# Altium PCB EMG_v5_FAB_READY.PcbDoc
Units mm, origin at the board's own origin, x right, y up, seen from the top; angles counter-clockwise.
Board outline 90 x 70 mm, 2 copper layers (F.Cu, B.Cu), stack 1.6 mm thick; 138 components, 76 nets, 371 pads, 155 vias.
Unrouted connection lines stored in the file: 5.
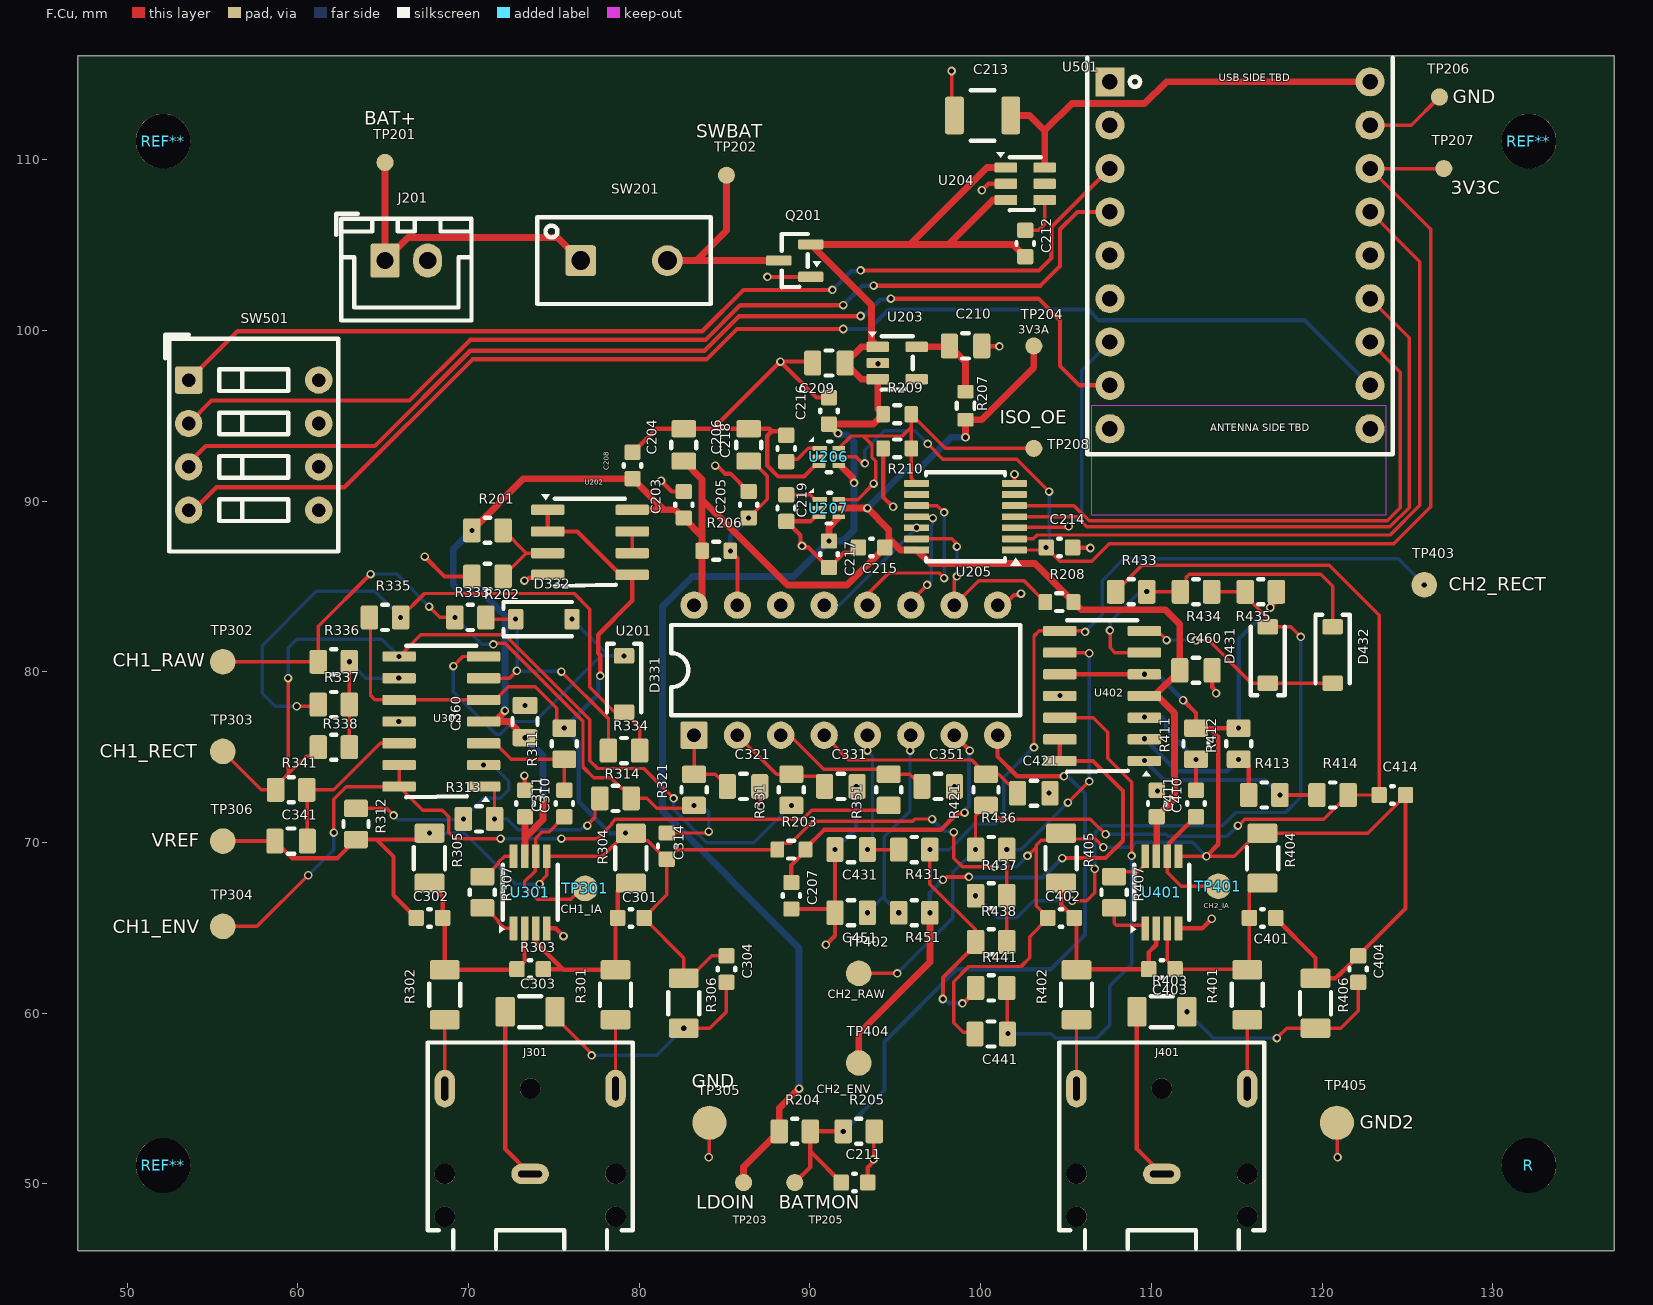
[diagram p0: F.Cu view]
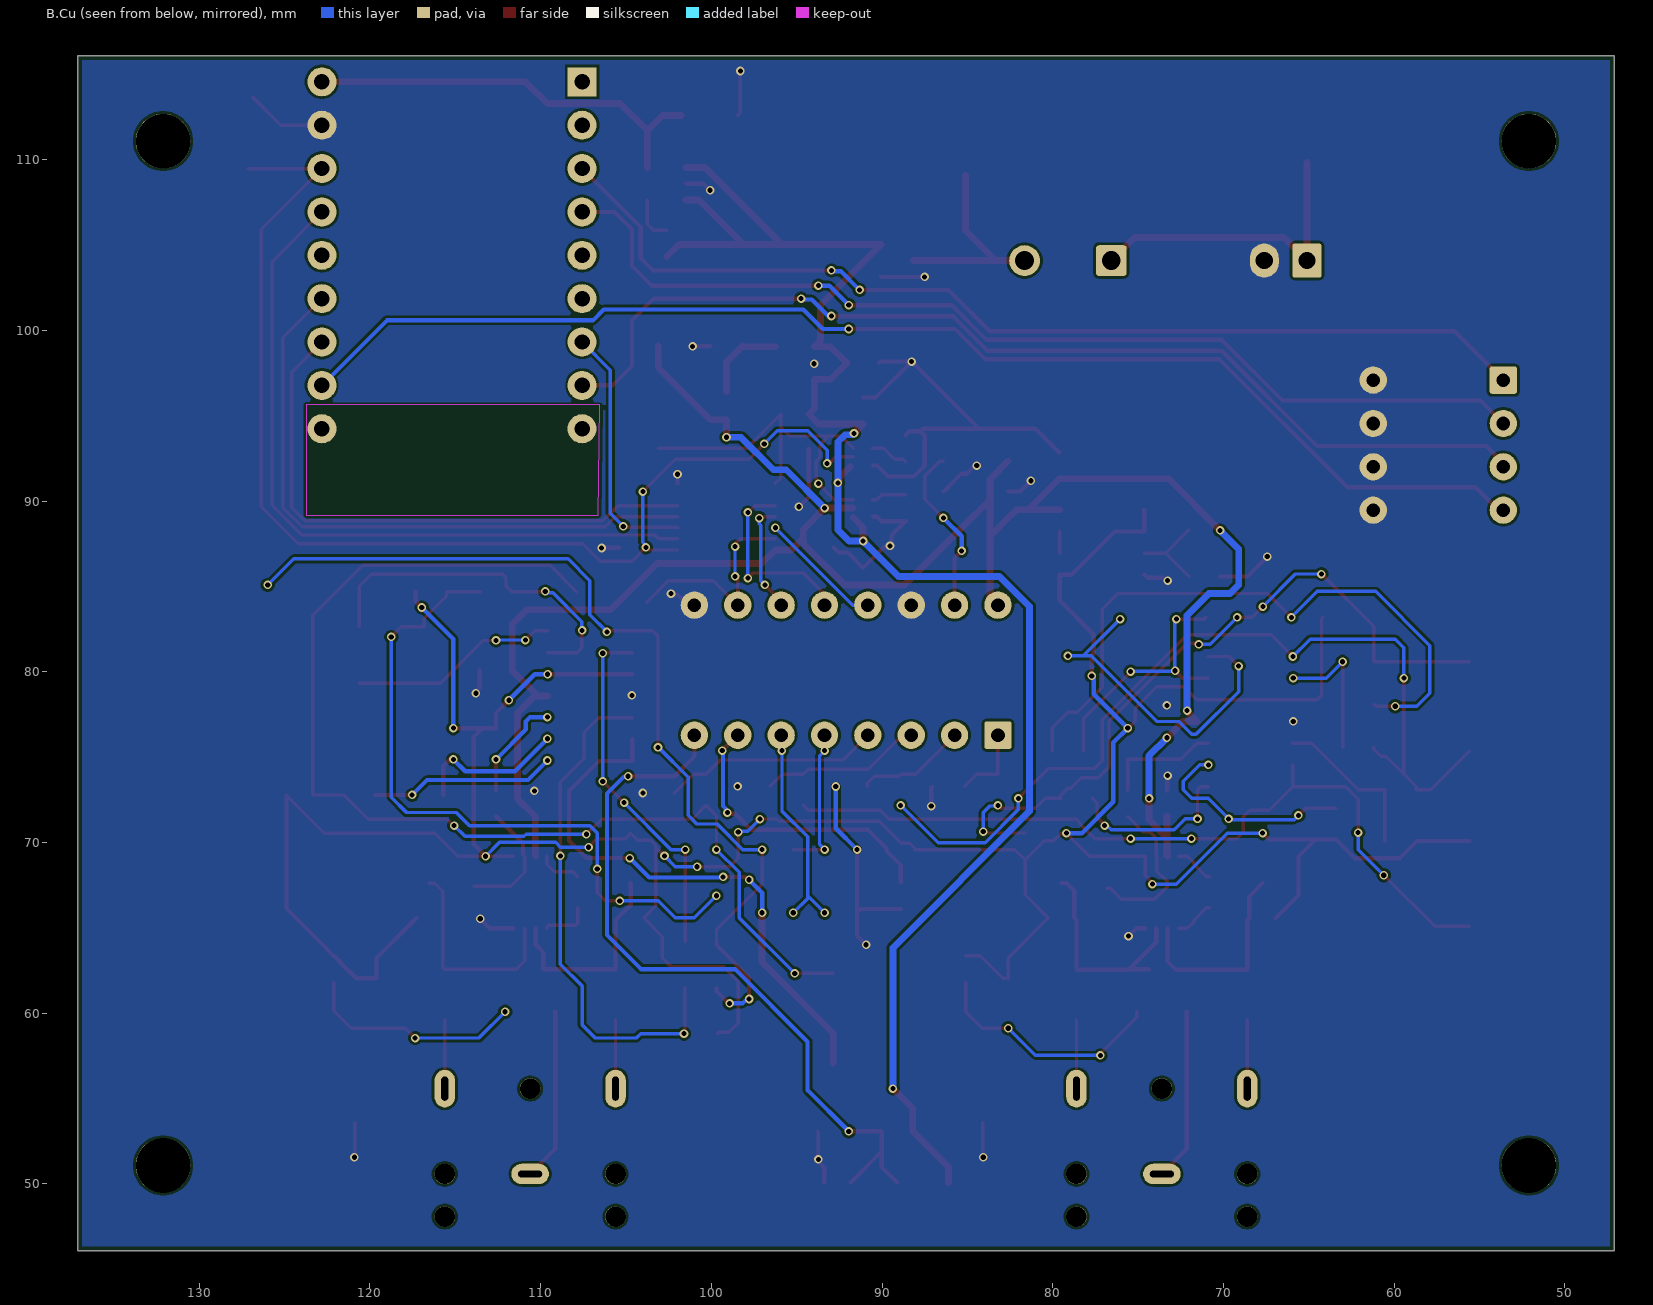
[diagram p1: B.Cu view, seen from below]

## Layer stack, top to bottom
F.Mask: solder mask 0.0102, Solder Resist, Dk 3.5
F.Cu: signal copper 0.0356
Dielectric 1: dielectric 1.5289, FR-4, Dk 4.8
B.Cu: signal copper 0.0356
B.Mask: solder mask 0.0102, Solder Resist, Dk 3.5

## Board outline
47.112,46.083 137.112,46.083 137.112,116.083 47.112,116.083

## Design rules (kind name [scope] priority, off if disabled: settings)
BoardOutlineClearance BoardOutlineClearanceBoard_Outline_Clearance_0p25 [IsPad Or IsVia Or OnLayer('F.Cu') Or OnLayer('B.Cu')] p1: gap=0.25 ignorepadtopadclearanceinfootprint=FALSE
Clearance "Clearence 0.25_NetClass" [InNetClass('ANALOG_SENSITIVE')] p1: gap=0.25 ignorepadtopadclearanceinfootprint=FALSE
Clearance "Clearence 0.15_NetClass" [InNetClass('Default') OR InNetClass('POWER')] p2: gap=0.15 ignorepadtopadclearanceinfootprint=FALSE
Clearance Clearance_General_0p15 [(IsPad Or IsVia Or OnLayer('F.Cu') Or OnLayer('B.Cu')) vs (IsPad Or IsVia Or OnLayer('F.Cu') Or OnLayer('B.Cu'))] p3: gap=0.15 ignorepadtopadclearanceinfootprint=FALSE
HoleSize Mounting_Holes_3p2mm [IsPad And (AsMM(HoleDiameter) >= 3.19) And (AsMM(HoleDiameter) <= 3.21)] p1: absolutevalues=TRUE maxlimit=3.4 minlimit=3 maxpercent=80.000 minpercent=20.000
HoleSize HoleSize_1 [All] p2: absolutevalues=TRUE maxlimit=2.54 minlimit=0.025 maxpercent=80.000 minpercent=20.000
MinimumAnnularRing MinimumAnnularRingMinimum_Annular_Ring_0p10 [IsVia Or (IsPad And PadIsPlated = 'True')] p1: minimumring=0.1
MinimumSolderMaskSliver [All] p1: minsoldermaskwidth=0
PolygonConnect [All] p1: connectstyle=Direct reliefconductorwidth=0.254 reliefentries=4 polygonreliefangle="90 Angle" airgapwidth=0.254
RoutingVias [All] p1: holewidth=0.711 width=0.5 viastyle="Through Hole" minholewidth=0.711 minwidth=0.5 maxholewidth=0.711 maxwidth=1
SilkToSilkClearance [All] p1: silktosilkclearance=0
SilkToSolderMaskClearance [IsPad] p1: minsilkscreentomaskgap=0.15 clearancetoexposedcopper=TRUE
SolderMaskExpansion [All] p1: expansion=0 istentingtop=FALSE
Width [All] p1: maxlimit=10 minlimit=0.2 preferedwidth=0.2 minimp=50.000000 maximp=50.000000 favimp=50.000000
26 further rules are at their usual default settings.

## Components (designator, comment, footprint, x,y, rotation, side; value= is the part's Value field where it differs from the comment)
C203 "Comment" C_0603_1608Metric 82.612,89.783 r90 top value=100nF
C204 "Comment" C_0805_2012Metric 82.612,93.283 r90 top value=1uF
C205 "Comment" C_0603_1608Metric 86.412,89.783 r90 top value=100nF
C206 "Comment" C_0805_2012Metric 86.412,93.283 r90 top value=1uF
C207 "Comment" C_0603_1608Metric 88.912,66.883 r270 top value=220pF
C208 "Comment" C_0603_1608Metric 79.612,92.083 r90 top value=100nF
C209 "Comment" C_0805_2012Metric 91.112,98.083 r180 top value=2.2uF
C210 "Comment" C_0805_2012Metric 99.112,99.083 r0 top value=2.2uF
C211 "Comment" C_0603_1608Metric 92.612,50.083 r0 top value=10nF
C212 "Comment" C_0603_1608Metric 102.612,105.083 r270 top value=2.2nF
C213 "Comment" C_1210_3225_Murata_GRM32_Reflow 100.112,112.583 r180 top value=47uF
C214 "Comment" C_0603_1608Metric 104.612,87.283 r0 top value=100nF
C215 "Comment" C_0603_1608Metric 93.612,87.283 r180 top value=100nF
C216 "Comment" C_0603_1608Metric 91.112,95.283 r90 top value=100nF
C217 "Comment" C_0603_1608Metric 91.112,86.883 r270 top value=100nF
C218 "Comment" C_0603_1608Metric 88.612,93.083 r90 top value=9.1nF
C219 "Comment" C_0603_1608Metric 88.612,89.583 r270 top value=9.1nF
C301 "Comment" C_0603_1608Metric 79.512,65.583 r180 top value=100pF
C302 "Comment" C_0603_1608Metric 67.712,65.583 r0 top value=100pF
C303 "Comment" C_0603_1608Metric 73.612,62.583 r180 top value=470pF
C304 "Comment" C_0603_1608Metric 85.112,62.583 r270 top value="100pF DNP"
C310 "Comment" C_0603_1608Metric 73.312,72.283 r270 top value=100nF
C311 "Comment" C_0603_1608Metric 75.612,72.283 r90 top value=100nF
C314 "Comment" C_0603_1608Metric 81.612,69.783 r270 top value=10nF
C321 "Comment" C_0805_2012Metric 86.112,73.283 r0 top value=1nF
C331 "Comment" C_0805_2012Metric 91.812,73.283 r0 top value=1nF
C341 "Comment" C_0805_2012Metric 59.612,70.083 r180 top value=1uF
C351 "Comment" C_0805_2012Metric 97.512,73.283 r0 top value=4.7nF
C360 "Comment" C_0805_2012Metric 73.312,77.083 r90 top value=100nF
C401 "Comment" C_0603_1608Metric 116.512,65.583 r180 top value=100pF
C402 "Comment" C_0603_1608Metric 104.712,65.583 r0 top value=100pF
C403 "Comment" C_0603_1608Metric 110.612,62.583 r180 top value=470pF
C404 "Comment" C_0603_1608Metric 122.112,62.583 r270 top value="100pF DNP"
C410 "Comment" C_0603_1608Metric 110.312,72.283 r270 top value=100nF
C411 "Comment" C_0603_1608Metric 112.612,72.283 r90 top value=100nF
C414 "Comment" C_0603_1608Metric 124.112,72.783 r0 top value=10nF
C421 "Comment" C_0805_2012Metric 103.112,72.883 r0 top value=1nF
C431 "Comment" C_0805_2012Metric 92.412,69.583 r180 top value=1nF
C441 "Comment" C_0805_2012Metric 100.612,58.783 r180 top value=1uF
C451 "Comment" C_0805_2012Metric 92.412,65.883 r180 top value=4.7nF
C460 "Comment" C_0805_2012Metric 112.612,80.083 r0 top value=100nF
D331 "Comment" D_SOD-123 79.112,79.283 r270 top value=BAS70ZFILM
D332 "Comment" D_SOD-123 74.412,83.083 r0 top value=BAS70ZFILM
D431 "Comment" D_SOD-123 116.812,80.983 r90 top value=BAS70ZFILM
D432 "Comment" D_SOD-123 120.612,80.983 r270 top value=BAS70ZFILM
J201 "Comment" JST_XH_B2B-XH-A_1x02_P2.50mm_Vertical 65.112,104.083 r0 top value=B2B-XH-A(LF)(SN)
J301 "Comment" Jack_3.5mm_CUI_SJ1-3523N_Horizontal 73.612,50.583 r0 top value=SJ1-3523N
J401 "Comment" Jack_3.5mm_CUI_SJ1-3523N_Horizontal 110.612,50.583 r0 top value=SJ1-3523N
Q201 "Comment" SOT-23 89.112,104.083 r180 top value=PMV48XP
R "Comment" MountingHole_3.2mm_M3 132.112,51.083 r0 top value=MountingHole_3.2mm_M3
R201 "Comment" R_0805_2012Metric 71.112,88.283 r0 top value=47k
R202 "Comment" R_0805_2012Metric 71.112,85.583 r180 top value=47k
R203 "Comment" R_0603_1608Metric 88.912,69.583 r0 top value=1k
R204 "Comment" R_0805_2012Metric 89.112,53.083 r0 top value=68k
R205 "Comment" R_0805_2012Metric 92.862,53.083 r0 top value=100k
R206 "Comment" R_0603_1608Metric 84.512,87.083 r0 top value=0R
R207 "Comment" R_0603_1608Metric 99.112,95.583 r270 top value=0R
R208 "Comment" R_0603_1608Metric 104.612,84.083 r0 top value=10k
R209 "Comment" R_0603_1608Metric 95.112,95.083 r0 top value="47k 1%"
R210 "Comment" R_0603_1608Metric 95.112,93.083 r180 top value="220k 1%"
R301 "Comment" R_1206_3216Metric 78.612,61.083 r90 top value=100k
R302 "Comment" R_1206_3216Metric 68.612,61.083 r90 top value=100k
R303 "Comment" R_1206_3216Metric 73.612,60.083 r0 top value=220k
R304 "Comment" R_1206_3216Metric 79.512,69.083 r270 top value=10M
R305 "Comment" R_1206_3216Metric 67.712,69.083 r270 top value=10M
R306 "Comment" R_1206_3216Metric 82.612,60.583 r270 top value=2.2M
R307 "Comment" R_0805_2012Metric 70.812,67.083 r270 top value="4.99k 0.1% RG"
R311 "Comment" R_0805_2012Metric 75.612,75.783 r90 top value=100k
R312 "Comment" R_0805_2012Metric 63.412,71.083 r270 top value=10k
R313 "Comment" R_0805_2012Metric 70.612,71.383 r0 top value=40.2k
R314 "Comment" R_0805_2012Metric 78.612,72.583 r0 top value=33k
R321 "Comment" R_0805_2012Metric 83.212,73.083 r90 top value=470R
R331 "Comment" R_0805_2012Metric 88.912,73.083 r90 top value=470R
R333 "Comment" R_0805_2012Metric 70.112,83.183 r0 top value=10k
R334 "Comment" R_0805_2012Metric 79.112,75.383 r180 top value=10k
R335 "Comment" R_0805_2012Metric 65.112,83.183 r0 top value=1M
R336 "Comment" R_0805_2012Metric 62.112,80.583 r0 top value=20k
R337 "Comment" R_0805_2012Metric 62.112,78.083 r0 top value=10k
R338 "Comment" R_0805_2012Metric 62.112,75.583 r0 top value=20k
R341 "Comment" R_0805_2012Metric 59.612,73.083 r0 top value=33k
R351 "Comment" R_0805_2012Metric 94.612,73.083 r90 top value=470R
R401 "Comment" R_1206_3216Metric 115.612,61.083 r90 top value=100k
R402 "Comment" R_1206_3216Metric 105.612,61.083 r90 top value=100k
R403 "Comment" R_1206_3216Metric 110.612,60.083 r0 top value=220k
R404 "Comment" R_1206_3216Metric 116.512,69.083 r270 top value=10M
R405 "Comment" R_1206_3216Metric 104.712,69.083 r270 top value=10M
R406 "Comment" R_1206_3216Metric 119.612,60.583 r270 top value=2.2M
R407 "Comment" R_0805_2012Metric 107.812,67.083 r270 top value="4.99k 0.1% RG"
R411 "Comment" R_0805_2012Metric 112.612,75.783 r90 top value=100k
R412 "Comment" R_0805_2012Metric 115.112,75.783 r90 top value=10k
R413 "Comment" R_0805_2012Metric 116.612,72.783 r0 top value=40.2k
R414 "Comment" R_0805_2012Metric 120.612,72.783 r0 top value=33k
R421 "Comment" R_0805_2012Metric 100.312,73.083 r90 top value=470R
R431 "Comment" R_0805_2012Metric 96.112,69.583 r180 top value=470R
R433 "Comment" R_0805_2012Metric 108.812,84.683 r0 top value=10k
R434 "Comment" R_0805_2012Metric 112.612,84.683 r180 top value=10k
R435 "Comment" R_0805_2012Metric 116.412,84.683 r180 top value=1M
R436 "Comment" R_0805_2012Metric 100.612,69.583 r0 top value=20k
R437 "Comment" R_0805_2012Metric 100.612,66.883 r0 top value=10k
R438 "Comment" R_0805_2012Metric 100.612,64.183 r0 top value=20k
R441 "Comment" R_0805_2012Metric 100.612,61.483 r0 top value=33k
R451 "Comment" R_0805_2012Metric 96.112,65.883 r180 top value=470R
REF** "Comment" MountingHole_3.2mm_M3 52.112,111.083 r0 top value=MountingHole_3.2mm_M3
REF** "Comment" MountingHole_3.2mm_M3 52.112,51.083 r0 top value=MountingHole_3.2mm_M3
REF** "Comment" MountingHole_3.2mm_M3 132.112,111.083 r0 top value=MountingHole_3.2mm_M3
SW201 "Comment" TS02CQE_SPST_THT 79.112,104.083 r0 top value=TS02CQE
SW501 "Comment" A6D-4100_THT_P2.54mm_W7.62mm 53.612,97.083 r0 top value=DEBUG_CFG
TP201 "Comment" TestPoint_Pad_D1.0mm 65.112,109.833 r0 top value=BAT_PACK+
TP202 "Comment" TestPoint_Pad_D1.0mm 85.112,109.083 r0 top value=SW_BAT+
TP203 "Comment" TestPoint_Pad_D1.0mm 86.112,50.083 r0 top value=LDO_IN
TP204 "Comment" TestPoint_Pad_D1.0mm 103.112,99.083 r0 top value=3V3_ADC
TP205 "Comment" TestPoint_Pad_D1.0mm 89.112,50.083 r0 top value=BAT_MON
TP206 "Comment" TestPoint_Pad_D1.0mm 126.873,113.665 r0 top value=GND
TP207 "Comment" TestPoint_Pad_D1.0mm 127.127,109.474 r0 top value=CARRIER_3V3
TP208 "Comment" TestPoint_Pad_D1.0mm 103.112,93.083 r0 top value=SPI_ISO_OE
TP301 "Comment" TestPoint_Pad_D1.5mm 76.835,67.31 r0 top value=EMG1_IA_OUT
TP302 "Comment" TestPoint_Pad_D1.5mm 55.612,80.583 r0 top value=EMG1_RAW_DRV
TP303 "Comment" TestPoint_Pad_D1.5mm 55.612,75.333 r0 top value=EMG1_RECT_DRV
TP304 "Comment" TestPoint_Pad_D1.5mm 55.612,65.083 r0 top value=EMG1_ENV_DRV
TP305 "Comment" TestPoint_Pad_D2.0mm 84.112,53.583 r0 top value=GND_CH1
TP306 "Comment" TestPoint_Pad_D1.5mm 55.612,70.083 r0 top value=ANALOG_VREF
TP401 "Comment" TestPoint_Pad_D1.5mm 113.919,67.437 r0 top value=EMG2_IA_OUT
TP402 "Comment" TestPoint_Pad_D1.5mm 92.862,62.333 r0 top value=EMG2_RAW_DRV
TP403 "Comment" TestPoint_Pad_D1.5mm 125.984,85.09 r0 top value=EMG2_RECT_DRV
TP404 "Comment" TestPoint_Pad_D1.5mm 92.862,57.083 r0 top value=EMG2_ENV_DRV
TP405 "Comment" TestPoint_Pad_D2.0mm 120.862,53.583 r0 top value=GND_CH2
U201 "Comment" DIP-16_W7.62mm 83.212,76.283 r90 top value=MCP3208-CI/P
U202 "Comment" SOIC-8_3.9x4.9mm_P1.27mm 77.112,87.583 r0 top value=MCP6002-I/SN
U203 "Comment" SOT-23-5 95.112,98.083 r0 top value=TPS7A2033PDBVR
U204 "Comment" SOT-23-6 102.612,108.583 r0 top value=TPS22917DBVR
U205 "Comment" TSSOP-14_4.4x5mm_P0.65mm 99.112,89.083 r180 top value=TXU0304PWR
U206 "Comment" WSON-6_1.5x1.5mm_P0.5mm 91.112,92.583 r0 top value=TPS3899DL30DSER
U207 "Comment" WSON-6_1.5x1.5mm_P0.5mm 91.112,89.583 r0 top value=TPS3899DL29DSER
U301 "Comment" INA333_DGK_VSSOP-8_TI 73.612,67.083 r90 top value=INA333AIDGKT
U302 "Comment" SOIC-14_3.9x8.7mm_P1.27mm 68.412,77.083 r180 top value=MCP6004-I/SL
U401 "Comment" INA333_DGK_VSSOP-8_TI 110.612,67.083 r90 top value=INA333AIDGKT
U402 "Comment" SOIC-14_3.9x8.7mm_P1.27mm 107.112,78.583 r180 top value=MCP6004-I/SL
U501 "Comment" DSTK22807_ESP32H2_SuperMini_Carrier_Measured_THT 115.189,104.394 r0 top value=DSTK22807_ESP32H2_SuperMini_Measured

## Footprints (in the part's own frame and the unit in brackets; to place one, negate y for a bottom-side part, rotate by r counter-clockwise, add the part's x,y. Pads: shape width x height; smd on the part's side, far side on the other; paste and mask are expansions set on the pad)
A6D-4100_THT_P2.54mm_W7.62mm [mm]
  rrect16% 1.6x1.6 hole 0.8 mask+0: 1(0,0)
  round 1.6 hole 0.8 mask+0: 2(0,-2.54) 3(0,-5.08) 4(0,-7.62) 5(7.62,-7.62) 6(7.62,-5.08) 7(7.62,-2.54) 8(7.62,0)
  silkscreen extent -1.38,-10.04 8.76,2.66
C_0603_1608Metric [mm]
  rrect25% 0.9x0.95 smd mask+0: 1(-0.775,0) 2(0.775,0)
  silkscreen extent -0.08,-0.51 0.08,0.51
C_0805_2012Metric [mm]
  rrect25% 1x1.45 smd mask+0: 1(-0.95,0) 2(0.95,0)
  silkscreen extent -0.2,-0.73 0.2,0.73
C_1210_3225_Murata_GRM32_Reflow [mm]
  rrect23% 1.1x2.2 smd mask+0.05: 1(-1.65,0) 2(1.65,0)
  silkscreen extent -0.7,-1.48 0.7,1.48
D_SOD-123 [mm]
  rrect25% 0.9x1.2 smd mask+0: 1(-1.65,0) 2(1.65,0)
  silkscreen extent -2.36,-1 1.65,1
DIP-16_W7.62mm [mm]
  rrect16% 1.6x1.6 hole 0.8 mask+0: 1(0,0)
  round 1.6 hole 0.8 mask+0: 2(0,-2.54) 3(0,-5.08) 4(0,-7.62) 5(0,-10.16) 6(0,-12.7) 7(0,-15.24) 8(0,-17.78) 9(7.62,-17.78) 10(7.62,-15.24) 11(7.62,-12.7) 12(7.62,-10.16) 13(7.62,-7.62) 14(7.62,-5.08) 15(7.62,-2.54) 16(7.62,0)
  silkscreen extent 1.16,-19.11 6.46,1.33
DSTK22807_ESP32H2_SuperMini_Carrier_Measured_THT [mm]
  rect 1.7x1.7 hole 0.9 mask+0: 1(-7.62,10.16)
  round 1.7 hole 0.9 mask+0: 2(-7.62,7.62) 3(-7.62,5.08) 4(-7.62,2.54) 5(-7.62,0) 6(-7.62,-2.54) 7(-7.62,-5.08) 8(-7.62,-7.62) 9(-7.62,-10.16) 10(7.62,10.16) 11(7.62,7.62) 12(7.62,5.08) 13(7.62,2.54) 14(7.62,0) 15(7.62,-2.54) 16(7.62,-5.08) 17(7.62,-7.62) 18(7.62,-10.16)
  silkscreen extent -8.95,-11.65 8.95,11.56
INA333_DGK_VSSOP-8_TI [mm]
  rrect11% 1.4x0.45 smd mask+0.05: 1(-2.113,0.975) 2(-2.113,0.325) 3(-2.113,-0.325) 4(-2.113,-0.975) 5(2.113,-0.975) 6(2.113,-0.325) 7(2.113,0.325) 8(2.113,0.975)
  silkscreen extent -2.4,-1.61 1.61,1.82
Jack_3.5mm_CUI_SJ1-3523N_Horizontal [mm]
  rrect100% 1.2x2.2 hole 1.4 slot 0.4 at 0 deg mask+0: R(-5,5) T(5,5)
  rrect100% 2.2x1.2 hole 0.4 slot 1.4 at 0 deg mask+0: S(0,0)
  round 1.2 hole 1.2 unplated mask+0: Un1(-5,0) Un2(-5,-2.5) Un3(0,5) Un4(5,0) Un5(5,-2.5)
  silkscreen extent -6,-4.37 6,7.7
JST_XH_B2B-XH-A_1x02_P2.50mm_Vertical [mm]
  rrect15% 1.7x2 hole 1 mask+0: 1(0,0)
  rrect100% 1.7x2 hole 1 mask+0: 2(2.5,0)
  silkscreen extent -2.85,-3.51 5.06,2.75
MountingHole_3.2mm_M3 [mm]
  round 3.2 hole 3.2 unplated mask+0: Un1(0,0)
R_0603_1608Metric [mm]
  rrect25% 0.8x0.95 smd mask+0: 1(-0.825,0) 2(0.825,0)
  silkscreen extent -0.18,-0.52 0.18,0.52
R_0805_2012Metric [mm]
  rrect24% 1.025x1.4 smd mask+0: 1(-0.913,0) 2(0.913,0)
  silkscreen extent -0.16,-0.73 0.16,0.73
R_1206_3216Metric [mm]
  rrect22% 1.125x1.75 smd mask+0: 1(-1.462,0) 2(1.462,0)
  silkscreen extent -0.66,-0.91 0.66,0.91
SOIC-8_3.9x4.9mm_P1.27mm [mm]
  rrect25% 1.95x0.6 smd mask+0: 1(-2.475,1.905) 2(-2.475,0.635) 3(-2.475,-0.635) 4(-2.475,-1.905) 5(2.475,-1.905) 6(2.475,-0.635) 7(2.475,0.635) 8(2.475,1.905)
  silkscreen extent -2.84,-2.56 2.06,2.8
SOIC-14_3.9x8.7mm_P1.27mm [mm]
  rrect25% 1.95x0.6 smd mask+0: 1(-2.475,3.81) 2(-2.475,2.54) 3(-2.475,1.27) 4(-2.475,0) 5(-2.475,-1.27) 6(-2.475,-2.54) 7(-2.475,-3.81) 8(2.475,-3.81) 9(2.475,-2.54) 10(2.475,-1.27) 11(2.475,0) 12(2.475,1.27) 13(2.475,2.54) 14(2.475,3.81)
  silkscreen extent -2.84,-4.44 2.06,4.7
SOT-23 [mm]
  rrect25% 1.475x0.6 smd mask+0: 1(-0.937,0.95) 2(-0.937,-0.95) 3(0.937,0)
  silkscreen extent -1.54,-1.56 0.76,1.56
SOT-23-5 [mm]
  rrect25% 1.325x0.6 smd mask+0: 1(-1.138,0.95) 2(-1.138,0) 3(-1.138,-0.95) 4(1.138,-0.95) 5(1.138,0.95)
  silkscreen extent -1.69,-1.56 0.91,1.84
SOT-23-6 [mm]
  rrect25% 1.325x0.6 smd mask+0: 1(-1.138,0.95) 2(-1.138,0) 3(-1.138,-0.95) 4(1.138,-0.95) 5(1.138,0) 6(1.138,0.95)
  silkscreen extent -1.69,-1.56 0.91,1.84
TestPoint_Pad_D1.0mm [mm]
  round 1 smd paste-1 mask+0: 1(0,0)
TestPoint_Pad_D1.5mm [mm]
  round 1.5 smd paste-1.5 mask+0: 1(0,0)
TestPoint_Pad_D2.0mm [mm]
  round 2 smd paste-2 mask+0: 1(0,0)
TS02CQE_SPST_THT [mm]
  rrect20% 1.8x1.8 hole 1.1 mask+0: 1(-2.54,0)
  round 1.8 hole 1.1 mask+0: 2(2.54,0)
  silkscreen extent -5.08,-2.54 5.08,2.54
TSSOP-14_4.4x5mm_P0.65mm [mm]
  rrect25% 1.475x0.4 smd mask+0: 1(-2.863,1.95) 2(-2.863,1.3) 3(-2.863,0.65) 4(-2.863,0) 5(-2.863,-0.65) 6(-2.863,-1.3) 7(-2.863,-1.95) 8(2.863,-1.95) 9(2.863,-1.3) 10(2.863,-0.65) 11(2.863,0) 12(2.863,0.65) 13(2.863,1.3) 14(2.863,1.95)
  silkscreen extent -3.29,-2.61 2.31,2.88
WSON-6_1.5x1.5mm_P0.5mm [mm]
  rrect25% 0.85x0.28 smd mask+0: 1(-0.525,0.5)
  rrect25% 0.75x0.28 smd mask+0: 2(-0.575,0) 3(-0.575,-0.5) 4(0.575,-0.5) 5(0.575,0) 6(0.575,0.5)
  silkscreen extent -1.18,-0.9 0.13,1.18

## Part data
C203 C204 C205 C206 C207 C208 C209 C210 C211 C212 C213 C214 C215 C216 C217 C218 C219 C301 C302 C303 C304 C310 C311 C314 C321 C331 C341 C351 C360 C401 C402 C403 C404 C410 C411 C414 C421 C431 C441 C451 C460: library part C, ki_fp_filters=C_*
  C203 C204 C205 C206 C207 C301 C302 C303 C304 C310 C311 C314 C321 C331 C341 C351 C360 C401 C402 C403 C404 C410 C411 C414 C421 C431 C441 C451 C460: KiLib_Generator=SMD_2terminal_chip_molded
  C208 C209 C210 C211 C214 C215 C216 C217 C218 C219: Datasheet=~, KiLib_Generator=SMD_2terminal_chip_molded
  C212: Datasheet=~, Description="TPS22917 CT timing capacitor; C0G/NP0, 10V minimum, +/-10% or better; exact MPN unresolved", KiLib_Generator=SMD_2terminal_chip_molded
  C213: Datasheet=~, Description="Carrier-side local bulk capacitor; X7R preferred, X5R acceptable, 10V minimum; exact MPN and effective capacitance unresolved"
D331 D332 D431 D432: library part D_Schottky, ki_fp_filters="TO-???* *_Diode_* *SingleDiode* D_*"
J201: library part EMG_Conn_01x02_Pin, Datasheet=~, KiLib_Generator=connector/JST
J301 J401: library part AudioJack3, ki_fp_filters=Jack*
Q201: library part PMV48XP, Datasheet=https://assets.nexperia.com/documents/data-sheet/PMV48XP.pdf, KiLib_Generator=package/gullwing
R REF** REF** REF**: library part MountingHole_3.2mm_M3, "Mounting Hole 3.2mm, M3, no annular, generated by kicad-footprint-generator mountinghole.py", KiLib_Generator=mounting_hardware/mounting_hole
R201 R202 R203 R204 R205 R206 R207 R208 R209 R210 R301 R302 R303 R304 R305 R306 R307 R311 R312 R313 R314 R321 R331 R333 R334 R335 R336 R337 R338 R341 R351 R401 R402 R403 R404 R405 R406 R407 R411 R412 R413 R414 R421 R431 R433 R434 R435 R436 R437 R438 R441 R451: library part R, KiLib_Generator=SMD_2terminal_chip_molded, ki_fp_filters=R_*
  R206 R207 R209 R210: Datasheet=~
  R208: Datasheet=~, Description="MCP3208 ADC-side CS/SHDN pull-up to 3V3_ADC"
SW201: library part EMG_SW_SPST, Datasheet=~
SW501: library part SW_DIP_x04, Description="4x DIP Switch, Single Pole Single Throw (SPST) switch, small symbol", KiLib_Generator=button_switch/DIP, ki_fp_filters=SW?DIP?x4*
TP201 TP207 TP208: library part EMG_TestPoint_1, Datasheet=~
TP202: library part EMG_TestPoint_2, Datasheet=~
TP203: library part EMG_TestPoint_3, Datasheet=~
TP204: library part EMG_TestPoint_4, Datasheet=~
TP205: library part EMG_TestPoint_5, Datasheet=~
TP206: library part EMG_TestPoint, Datasheet=~
TP301 TP302 TP303 TP304 TP305 TP306 TP401 TP402 TP403 TP404 TP405: library part TestPoint, Description="test point", ki_fp_filters="Pin* Test*"
U201: library part MCP3208, KiLib_Generator=package/DIP/legacy, ki_fp_filters="DIP*W7.62mm* SOIC*3.9x9.9mm*P1.27mm*"
U202: library part MCP6002-xP, KiLib_Generator=package/gullwing, ki_fp_filters="SOIC*3.9x4.9mm*P1.27mm* DIP*W7.62mm* TO*99* OnSemi*Micro8* TSSOP*3x3mm*P0.65mm* TSSOP*4.4x3mm*P0.65mm* MSOP*3x3mm*P0.65mm* SSOP*3.9x4.9mm*P0.635mm* LFCSP*2x2mm*P0.5mm* *SIP* SOIC*5.3x6.2mm*P1.27mm*"
U203: library part TPS7A2033PDBVR, Datasheet=https://www.ti.com/lit/ds/symlink/tps7a20.pdf, KiLib_Generator=package/gullwing
U204: library part TPS22917DBV, Datasheet=https://www.ti.com/lit/ds/symlink/tps22917.pdf, Description="1V to 5.5V, 2A load switch with full-time reverse-current blocking; exact MPN TPS22917DBVR", KiLib_Generator=package/gullwing, ki_fp_filters=SOT?23*
U205: library part TXU0304PWR_1, Datasheet=https://www.ti.com/lit/ds/symlink/txu0304.pdf, Description="TXU0304 fixed-direction four-bit dual-supply translator; PW 14-pin TSSOP pinout", KiLib_Generator=package/gullwing
U206 U207: library part TPS3899DL_DSE_1, Datasheet=https://www.ti.com/lit/ds/symlink/tps3899.pdf
  U206: Description="TPS3899DL active-low open-drain 3.0 V supervisor; DSE 6-pin WSON"
  U207: Description="TPS3899DL active-low open-drain 2.9 V supervisor; DSE 6-pin WSON"
U301 U401: library part INA333xxDGK, KiLib_Generator=package/gullwing, ki_fp_filters=VSSOP*3x3mm*P0.65mm*
U302 U402: library part MCP6004, KiLib_Generator=package/gullwing, ki_fp_filters="SOIC*3.9x8.7mm*P1.27mm* DIP*W7.62mm* TSSOP*4.4x5mm*P0.65mm* SSOP*5.3x6.2mm*P0.65mm* MSOP*3x3mm*P0.5mm*"
U501: library part DSTK22807_ESP32H2_SuperMini_Measured, Power_Assumption="GND is Power Input. 5V_VBUS and 3V3 are set as Power Input pins to avoid declaring the dev board as a rail source; USB-measured output behavior and external 3V3 powering are not approved by this symbol.", Description="DSTK22807 ESP32-H2 Super Mini dev board symbol matched to measured project-local carrier footprint. Pinout is based on project physical observation notes; right-row orientation and power-path behavior remain provisional."

## Via types
v1: diameter 0.5, hole 0.3, F.Cu to B.Cu, tented both sides, 155 vias

## Nets (pads, with @x,y where several pads share a name; then routed paths per layer and width w, separated by ;. In a path a pad name is that pad's centre, name@x,y a point inside that pad or via, vN(x,y) a via of type N, cw(c..) or ccw(c..) an arc to the next point about the centre after c; other vN are vias at no path point)
3V3_ADC: C203.1 C204.1 C208.1 C215.1 C310.2 C360.1 C410.2 C460.1 R201.1 R206.1 R207.2 R208.2 TP204.1 U201.16 U202.8 U205.14 U207.5 U301.7 U302.4 U401.7 U402.4 | length 121.2
  F.Cu w0.4: v1(70.199,88.283) 73.224,91.308 C208.1 81.362,89.558 81.362,89.488 ; v1(72.136,77.724) 72.136,77.67 71.975,77.509 71.975,77.496 71.562,77.083 71.549,77.083 72.362,77.083 v1(73.312,76.133) ; U301.7 73.312,69.22 73.312,70.333 ; C310.2@73.312,71.533 C310.2 73.312,70.333 ; v1(74.362,72.583) 74.362,71.333 73.362,70.333 73.312,70.333 ; U202.8 81.362,89.488 ; C204.1 83.687,91.258 83.687,90.333 ; U201.16 83.687,84.378 R206.1 83.687,87.933 ; U207.5 v1(93.362,89.583) 94.612,88.333 94.612,87.833 ; v1(99.112,93.733) R207.2 100.037,94.758 103.112,97.833 TP204.1 ; U401.7 110.312,69.22 C410.2 111.362,72.558 111.362,77.583 110.362,78.583 U402.4 110.162,78.583 C460.1 111.662,82.775 110.804,83.633 105.887,83.633 R208.2 103.187,86.333 97.05,86.333 U205.14 95.312,87.133 94.612,87.833 ; 81.362,89.488 82.132,89.488 C203.1 83.687,87.933 ; 83.687,87.933 83.687,90.333 ; 83.687,90.333 83.687,90.075 85.396,88.367 88.686,85.076 92.18,85.076 C215.1 94.612,87.508 94.612,87.833
  B.Cu w0.4: v1(70.199,88.283) 69.112,87.195 69.112,85.083 69.612,84.583 70.862,84.583 72.136,83.309 v1(72.136,77.724) ; v1(73.312,76.133) 74.362,75.083 v1(74.362,72.583) ; v1(93.362,89.583) 95.612,91.833 96.362,91.833 98.262,93.733 v1(99.112,93.733)
ADC_CS: R208.1 U201.10 U205.13 | length 12.6
  F.Cu w0.2: U205.13 98.312,87.783 98.612,87.483 v1(98.612,87.333) ; v1(98.612,85.583) 98.452,85.423 U201.10 99.882,85.333 102.537,85.333 R208.1
  B.Cu w0.2: v1(98.612,85.583) v1(98.612,87.333)
ADC_MISO: U201.12 U205.10 | length 11.4
  F.Cu w0.2: U201.12 93.372,84.543 94.612,85.783 97.562,85.783 v1(97.862,85.483) ; U205.10 97.462,89.733 v1(97.862,89.333)
  B.Cu w0.2: v1(97.862,85.483) v1(97.862,89.333)
ADC_MOSI: U201.11 U205.11 | length 6.6
  F.Cu w0.2: U201.11 95.912,84.133 v1(96.862,85.083) ; U205.11 97.106,89.083 v1(97.191,88.998)
  B.Cu w0.2: v1(96.862,85.083) 97.112,85.333 97.112,88.583 97.191,88.662 v1(97.191,88.998)
ADC_REF: C205.1 C206.1 R206.2 U201.15 | length 10.1
  F.Cu w0.2: v1(86.412,89.008) 86.43,89.008 86.779,89.357 86.779,89.375 87.503,90.099 87.503,91.467 86.637,92.333 C206.1
  F.Cu w0.25: v1(85.337,87.083) 85.752,86.668 U201.15
  B.Cu w0.25: v1(85.337,87.083) 85.337,87.933 v1(86.412,89.008)
ADC_SCLK: U201.13 U205.12 | length 7.3
  B.Cu w0.2: U201.13 91.719,83.903 v1(96.25,88.433)
"analog VREF": C301.1 C302.1 C304.1 C314.2 C341.2 C401.1 C402.1 C404.1 C414.2 C441.2 R203.1 R304.1 R305.1 R306.1 R311.2 R312.2 R335.1 R404.1 R405.1 R406.1 R411.2 R412.2 R435.1 TP306.1 U202.1 U202.2 U202.5 U301.5 U302.5 U302.10 U401.5 U402.5 U402.10 | length 206.1
  F.Cu w0.2: R335.1 64.262,83.121 64.262,78.613 64.522,78.353 U302.10 U302.5 71.562,78.353 72.33,79.121 73.914,79.121 75.173,77.862 75.173,77.106 75.584,76.696 v1(75.612,76.696) ; v1(74.168,67.564) 74.168,67.653 74.587,68.072 U301.5 77.85,69.196 v1(79.2,70.545) ; R304.1 79.96,70.098 80.497,70.098 81.587,69.008 C314.2 ; C301.1@80.287,65.558 82.612,63.233 R306.1 82.924,62.045 84.237,63.358 C304.1 ; C301.1 80.287,65.608 81.612,66.933 C314.2 ; v1(97.155,71.374) 96.139,71.374 96.012,71.247 90.17,71.247 88.881,69.958 88.387,69.958 88.087,69.658 R203.1 82.219,69.583 81.644,69.008 C314.2 ; v1(98.425,70.612) 98.425,69.088 98.936,68.577 v1(100.836,68.577) ; C441.2 99.563,58.882 98.979,58.882 98.425,59.436 98.425,61.849 99.314,62.738 102.362,62.738 102.87,63.246 102.87,64.491 103.937,65.558 C402.1 103.937,65.608 103.251,66.294 103.251,69.723 ; v1(102.743,69.215) 103.251,69.723 ; v1(107.188,69.723) 106.704,70.207 105.051,70.207 R405.1 104.303,70.136 103.537,70.136 103.251,69.85 103.251,69.723 ; U401.5 v1(113.218,69.196) 114.85,69.196 116.2,70.545 R404.1 122.674,70.545 C414.2@124.887,72.758
  F.Cu w0.25: TP306.1 C341.2 59.662,69.083 62.325,69.083 R312.2 64.612,70.17 ; C302.1 65.612,66.908 65.612,69.17 64.612,70.17 ; v1(67.712,70.546) 67.337,70.17 64.612,70.17 ; U202.1 U202.2 76.372,88.218 78.912,85.678 U202.5 79.587,84.159 77.597,82.169 77.597,81.085 77.718,80.965 v1(77.718,79.756) ; U402.10 v1(109.587,79.853) ; v1(111.862,78.333) 112.612,77.583 R411.2 113.411,76.696 ; v1(113.218,69.196) 113.919,69.896 113.919,76.188 113.411,76.696 ; v1(115.112,76.696) 113.411,76.696 ; v1(116.958,83.765) 117.324,84.131 R435.1 ; C401.1 117.287,65.558 119.612,63.233 R406.1 120.8,62.045 121.762,63.008 121.762,63.033 122.087,63.358 C404.1 122.137,63.358 122.462,63.683 122.462,63.708 124.887,66.133 C414.2@124.887,72.758
  B.Cu w0.2: v1(67.712,70.546) 69.789,70.546 72.771,67.564 v1(74.168,67.564) ; v1(97.155,71.374) 97.875,70.654 98.383,70.654 v1(98.425,70.612) ; v1(100.836,68.577) 102.105,68.577 v1(102.743,69.215) ; v1(107.188,69.723) 108.839,69.723 109.124,70.008 112.406,70.008 v1(113.218,69.196)
  B.Cu w0.25: v1@77.597,79.756 77.597,78.681 v1(75.612,76.696) 76.454,75.854 76.454,72.39 78.299,70.545 v1(79.2,70.545) ; v1(109.587,79.853) 110.342,79.853 v1(111.862,78.333) ; v1(115.112,76.696) 115.112,81.919 v1(116.958,83.765)
BAT_MON: C211.1 R204.2 R205.1 TP205.1 U201.8 | length 44
  F.Cu w0.25: TP205.1 90.025,50.996 90.025,51.833 ; C211.1 90.087,51.833 90.025,51.833 ; v1(91.95,53.083) R204.2 90.025,51.833 ; U201.8 100.992,75.03 102.139,73.883 104.871,73.883 v1(104.873,73.881)
  B.Cu w0.25: v1(91.95,53.083) 94.362,55.495 94.362,58.333 98.612,62.583 104.112,62.583 106.112,64.583 106.112,72.863 105.142,73.833 104.921,73.833 v1(104.873,73.881)
BAT_PACK+: J201.1 SW201.1 TP201.1 | length 18.3
  F.Cu w0.4: TP201.1 J201.1 66.462,105.433 75.222,105.433 SW201.1
CARRIER_3V3: C214.1 TP207.1 U205.1 U206.5 U501.12 | length 70.2
  F.Cu w0.2: U206.5 92.699,92.583 93.08,92.202 v1(93.218,92.202) ; v1(96.901,93.345) 97.79,92.456 102.108,92.456 v1(104.013,90.551) ; U205.1 103.687,87.133 v1(103.837,87.283) 104.641,86.479 106.513,86.479 107.536,87.503 124.206,87.503 126.365,89.662 126.365,105.918 U501.12 TP207.1
  B.Cu w0.2: v1(93.218,92.202) 93.218,92.964 94.361,94.107 96.139,94.107 v1(96.901,93.345) ; v1(103.837,87.283) 103.837,87.421 104.013,87.597 v1(104.013,90.551)
CARRIER_VBUS_SW: C213.1 U204.6 U501.10 | length 24.8
  F.Cu w0.4: C213.1 102.862,112.583 103.75,111.695 ; U204.6 103.75,111.695 ; U501.10 110.871,114.554 109.601,113.284 105.338,113.284 103.75,111.695
CFG_CAL: SW501.4 U501.17 | length 75.9
  F.Cu w0.25: SW501.4 53.903,89.463 55.245,90.805 62.738,90.805 70.231,98.298 83.947,98.298 85.725,100.076 v1@91.931,100.076
  B.Cu w0.25: v1(91.948,100.076) 93.472,100.076 94.615,101.219 106.299,101.219 106.934,100.584 118.999,100.584 U501.17
CFG_FILTER: SW501.3 U501.8 | length 61.8
  F.Cu w0.25: SW501.3 53.612,92.22 54.61,93.218 64.516,93.218 70.104,98.806 83.82,98.806 85.835,100.821 92.947,100.821 v1(92.964,100.838) ; v1(94.742,101.854) 103.378,101.854 104.648,100.584 104.648,97.917 105.791,96.774 U501.8
  B.Cu w0.25: v1(92.964,100.838) 93.012,100.886 93.198,100.886 94.119,101.806 94.694,101.806 v1(94.742,101.854)
CFG_LED: SW501.2 U501.4 | length 60.4
  F.Cu w0.25: SW501.2 54.954,95.885 66.548,95.885 70.104,99.441 83.889,99.441 85.921,101.473 v1(91.948,101.473) ; v1(93.726,102.616) 103.505,102.616 104.648,103.759 104.648,105.918 105.664,106.934 U501.4
  B.Cu w0.25: v1(91.948,101.473) 93.091,102.616 v1(93.726,102.616)
CFG_SERVICE: SW501.1 U501.3 | length 60.2
  F.Cu w0.25: SW501.1 56.478,99.949 83.693,99.949 86.106,102.362 v1(91.313,102.362) ; v1(92.964,103.505) 103.416,103.505 104.14,104.229 104.14,106.045 U501.3
  B.Cu w0.25: v1(91.313,102.362) 92.408,103.457 92.916,103.457 v1(92.964,103.505)
EMG1_ENV: C351.1 R351.2 U201.3 | length 9.5
  F.Cu w0.2: U201.3 88.56,76.015 89.085,76.015 90.805,74.295 94.313,74.295 R351.2 95.85,73.996 C351.1
EMG1_ENV_DRV: R351.1 TP304.1 U302.13 U302.14 | length 48
  F.Cu w0.2: TP304.1 57.612,65.083 v1(60.612,68.083) ; v1(62.112,70.583) 62.112,72.533 62.852,73.273 U302.14 ; U302.13 U302.14 ; v1(71.882,70.231) 69.215,70.231 68.837,70.609 68.837,71.498 68.453,71.882 67.328,71.882 U302.14 ; v1(75.438,70.231) 77.546,70.231 78.387,71.072 78.387,71.139 78.606,71.358 89.593,71.358 90.116,71.881 94.322,71.881 R351.1
  B.Cu w0.2: v1(60.612,68.083) 62.112,69.583 v1(62.112,70.583) ; v1(71.882,70.231) v1(75.438,70.231)
EMG1_IA_OUT: C311.1 TP301.1 U301.6 | length 9.4
  F.Cu w0.2: C311.1 75.587,71.508 74.691,70.612 74.295,70.612 73.937,70.254 U301.6 73.901,69.159 73.901,68.313 73.279,67.691 73.279,67.437 74.041,66.675 75.985,66.675 76.62,67.31 TP301.1
EMG1_IN_N: J301.R R302.1 | length 4
  F.Cu w0.2: J301.R R302.1
EMG1_IN_N_PROT: C302.2 C303.2 R302.2 R305.2 U301.2 | length 12.3
  F.Cu w0.25: R305.2 68.487,66.846 C302.2 68.612,65.458 R302.2 72.799,62.546 C303.2 73.287,63.033 U301.2
EMG1_IN_P: J301.T R301.1 | length 4
  F.Cu w0.2: J301.T R301.1
EMG1_IN_P_PROT: C301.2 C303.1 R301.2 R304.2 U301.3 | length 13.7
  F.Cu w0.25: 73.937,64.239 U301.3 73.937,64.158 75.55,62.546 ; C303.1 75.512,62.583 75.55,62.546 ; R304.2 79.2,67.62 78.737,67.158 C301.2 78.612,65.458 R301.2 75.55,62.546
EMG1_RAW: C321.1 R321.2 U201.1 | length 4.5
  F.Cu w0.2: U201.1 R321.2 84.45,73.996 C321.1
EMG1_RAW_DRV: C314.1 R314.2 R321.1 R333.1 R336.1 TP302.1 | length 42.8
  F.Cu w0.2: TP302.1 R336.1 61.199,82.662 v1(64.262,85.725) ; v1(67.691,83.82) 68.328,83.183 v1(69.2,83.183) ; v1(71.454,81.605) 71.51,81.661 72.141,81.661 76.708,77.094 76.708,74.422 77.343,73.787 78.32,73.787 78.939,73.169 79.114,73.169 79.524,72.758 R314.2 80.452,72.583 81.026,72.009 83.05,72.009 v1(83.212,72.171) ; C314.1 83.991,70.558 v1(84.074,70.641)
  B.Cu w0.2: v1(64.262,85.725) 65.786,85.725 v1(67.691,83.82) ; v1(69.2,83.183) 70.778,81.605 v1(71.454,81.605) ; v1(83.212,72.171) 83.247,72.136 83.693,72.136 84.074,71.755 v1@84.074,70.866
EMG1_RAW_GAIN: R313.2 R314.1 U302.1 | length 10.1
  F.Cu w0.2: U302.1 71.325,73.273 71.525,73.073 v1(71.525,71.383) ; v1(76.962,70.993) 76.962,71.024 77.41,71.472 77.41,72.293 R314.1
  B.Cu w0.2: v1(71.525,71.383) 72.254,71.383 72.898,70.739 76.57,70.739 76.824,70.993 v1(76.962,70.993)
EMG1_RECT: C331.1 R331.2 U201.2 | length 6.5
  F.Cu w0.2: U201.2 88.039,73.996 R331.2 89.038,73.869 90.464,73.869 90.862,73.471 C331.1
EMG1_RECT_A1_OUT: D331.2 R334.1 R335.2 R337.1 | length 38.4
  F.Cu w0.2: v1(59.944,77.978) 61.094,77.978 R337.1 ; v1(66.025,83.183) 67.425,84.583 76.199,84.583 77.112,83.67 77.112,79.083 78.562,77.633 D331.2 80.025,76.72 R334.1
  B.Cu w0.2: v1(59.944,77.978) 58.674,77.978 57.912,78.74 57.912,81.534 61.087,84.709 64.499,84.709 v1(66.025,83.183)
EMG1_RECT_DRV: R331.1 R338.1 R341.1 TP303.1 U302.8 | length 53.6
  F.Cu w0.2: TP303.1 57.862,73.083 R341.1 58.699,73.271 59.385,73.956 ; v1(59.436,79.629) 59.436,74.007 59.385,73.956 ; R338.1 61.199,75.468 60.789,75.057 60.486,75.057 59.385,73.956 ; v1(65.937,80.893) 67.213,82.169 72.136,82.169 77.112,77.193 77.112,74.78 77.559,74.333 80.262,74.333 v1(82.012,72.583)
  B.Cu w0.2: v1(59.436,79.629) 59.436,81.407 59.944,81.915 64.915,81.915 v1(65.937,80.893) ; v1(82.012,72.583) 82.012,71.933 83.968,69.977 86.719,69.977 v1(88.912,72.171)
EMG1_RECT_SUM1: D332.1 R333.2 R334.2 U302.6 | length 15.4
  F.Cu w0.2: U302.6 72.402,79.623 v1(72.836,80.057) ; R333.2 71.125,83.083 v1(72.762,83.083) ; v1(75.438,80.01) 78.2,77.248 R334.2
  B.Cu w0.2: v1(72.762,83.083) 72.862,82.983 v1@72.862,80.083 ; v1(72.836,80.057) v1@72.862,80.083 ; v1(75.438,80.01) 75.415,80.033 72.912,80.033 v1@72.862,80.083
EMG1_RECT_SUM2: R336.2 R337.2 R338.2 U302.9 | length 8.3
  F.Cu w0.2: R338.2 R337.2 v1(63.024,80.583)
  B.Cu w0.2: v1(63.024,80.583) 63.979,79.629 v1(65.913,79.629)
EMG1_RECT_U302B_DRV: D331.1 D332.2 U302.7 | length 19.5
  F.Cu w0.2: v1(69.112,80.333) 69.672,80.893 U302.7
  B.Cu w0.2: v1(69.112,80.333) 69.112,78.833 71.612,76.333 71.862,76.333 72.618,77.089 73.914,77.089 77.758,80.933 78.212,80.933 ; v1(76.062,83.083) 78.212,80.933 ; v1(79.112,80.933) 78.212,80.933
EMG1_REF_BIAS: C304.2 R303.2 R306.2 | length 14.1
  F.Cu w0.2: R303.2 75.074,59.758 77.216,57.616 v1(77.216,57.531) ; v1(82.612,59.121) 84.14,59.121 85.09,60.071 85.09,61.786 C304.2
  B.Cu w0.2: v1(77.216,57.531) 81.022,57.531 v1(82.612,59.121)
EMG1_REF_ELECTRODE: J301.S R303.1 | length 10.1
  F.Cu w0.25: R303.1 72.15,52.045 J301.S
EMG1_RG_A: R307.2 U301.1 | length 2.4
  F.Cu w0.2: R307.2 70.999,66.171 71.755,65.415 71.755,65.328 72.112,64.97 U301.1
EMG1_RG_B: R307.1 U301.8 | length 2.4
  F.Cu w0.2: R307.1 70.999,67.996 71.755,68.751 71.755,68.838 72.112,69.196 U301.8
EMG2_ENV: C451.1 R451.2 U201.6 | length 13
  F.Cu w0.2: v1(95.862,75.383) 95.912,75.433 U201.6
  B.Cu w0.2: v1(93.362,65.883) 94.362,66.883 94.362,67.083 ; v1(95.199,65.883) 94.362,66.72 94.362,67.083 ; v1(95.862,75.383) 95.862,71.833 94.362,70.333 94.362,67.083
EMG2_ENV_DRV: R451.1 TP404.1 U402.13 U402.14 | length 32.9
  F.Cu w0.25: v1(97.79,67.818) 97.858,67.818 98.023,67.983 v1(99.314,67.983) ; U402.13 U402.14 106.583,74.773 108.331,73.025 108.331,70.104 107.315,69.088 v1(104.775,69.088)
  F.Cu w0.4: TP404.1 92.862,58.826 97.024,62.988 v1(97.024,65.883)
  B.Cu w0.25: v1(97.024,65.883) 97.024,67.052 v1(97.79,67.818) ; v1(99.314,67.983) 99.352,67.945 103.632,67.945 v1(104.775,69.088)
EMG2_ENV_LPF_NODE: C441.1 R441.2 U402.12 | length 30.5
  F.Cu w0.2: R441.2 101.562,61.446 C441.1 ; U402.12 106.583,77.313 107.442,76.454 107.442,74.93 108.839,73.533 v1(108.839,69.215)
  B.Cu w0.2: v1(101.6,58.801) 104.146,58.801 104.4,58.547 106.807,58.547 107.569,59.309 107.569,61.595 108.839,62.865 v1(108.839,69.215)
EMG2_IA_OUT: C411.1 TP401.1 U401.6 | length 7.3
  F.Cu w0.2: U401.6 110.937,68.26 111.76,67.437 TP401.1
  F.Cu w0.25: U401.6 111.037,69.296 111.037,69.958 112.587,71.508 C411.1
EMG2_IN_N: J401.R R402.1 | length 4
  F.Cu w0.2: J401.R R402.1
EMG2_IN_N_PROT: C402.2 C403.2 R402.2 R405.2 U401.2 | length 12.3
  F.Cu w0.25: R405.2 104.712,66.358 C402.2 105.612,65.458 R402.2 105.649,62.583 C403.2 109.837,63.558 110.287,64.008 U401.2
EMG2_IN_P: J401.T R401.1 | length 4
  F.Cu w0.2: J401.T R401.1
EMG2_IN_P_PROT: C401.2 C403.1 R401.2 R404.2 U401.3 | length 12.4
  F.Cu w0.2: U401.3 110.937,63.065 111.387,62.615 C403.1 115.574,62.583 R401.2 115.737,62.67 C401.2 115.737,67.145 116.212,67.62 R404.2
EMG2_RAW: C421.1 R421.2 U201.4 | length 12.7
  F.Cu w0.2: U201.4 92.282,74.833 99.475,74.833 R421.2 101.05,73.996 C421.1
EMG2_RAW_DRV: C414.1 R414.2 R421.1 R433.1 R436.1 TP402.1 | length 66.8
  F.Cu w0.2: TP402.1 v1(95.112,62.333) ; v1(99.7,69.583) 99.7,71.558 R421.1 101.113,71.37 106.43,71.37 v1(107.315,70.485) ; R433.1 109.449,86.233 120.412,86.233 123.337,83.308 C414.1 R414.2 120.1,71.358 115.475,71.358 115.11,70.993 v1(115.062,70.993)
  B.Cu w0.2: v1(95.112,62.333) 98.355,65.576 98.355,65.826 98.362,65.833 98.362,68.245 v1(99.7,69.583) ; v1(107.315,70.485) 110.848,70.485 110.975,70.358 114.427,70.358 v1(115.062,70.993)
EMG2_RAW_GAIN: R413.2 R414.1 U402.1 | length 10.9
  F.Cu w0.25: v1(117.524,72.783) R414.1
  B.Cu w0.25: v1(109.601,74.803) 110.744,73.66 116.647,73.66 v1(117.524,72.783)
EMG2_RAW_GAIN_FB: R412.1 R413.1 U402.2 | length 9
  F.Cu w0.25: U402.2 109.601,76.057 v1(109.601,76.073) ; R412.1@115.206,74.964 115.699,74.471 R413.1
  B.Cu w0.25: v1(109.601,76.073) 111.506,74.168 114.409,74.168 v1(115.112,74.871)
EMG2_RAW_HPF_NODE: C411.2 R411.1 U402.3 | length 6.2
  F.Cu w0.25: U402.3 109.587,77.329 v1(109.601,77.343) ; C411.2 v1(112.612,74.871)
  B.Cu w0.25: v1(109.601,77.343) 110.617,77.343 110.871,77.089 110.871,76.612 v1(112.612,74.871)
EMG2_RECT: C431.1 R431.2 U201.5 | length 8.8
  F.Cu w0.2: v1(93.362,69.583) R431.2 ; v1(93.362,75.383) 93.372,75.393 U201.5
  B.Cu w0.2: v1(93.362,69.583) 93.662,69.883 93.662,75.083 v1(93.362,75.383)
EMG2_RECT_A1_OUT: D431.2 R434.1 R435.2 R437.1 | length 40.7
  F.Cu w0.2: v1(105.362,66.583) 106.207,66.583 106.687,67.063 106.687,68.446 v1(106.68,68.453) ; R434.1 R435.2 115.499,84.446 116.812,83.133 D431.2 118.154,82.633 v1(118.745,82.042)
  B.Cu w0.2: v1(99.7,66.883) 101,65.583 102.112,65.583 103.112,66.583 v1(105.362,66.583) ; v1(106.68,68.453) 106.68,70.557 107.108,70.985 114.165,70.985 114.935,71.755 117.856,71.755 118.745,72.644 v1(118.745,82.042)
EMG2_RECT_DRV: R431.1 R438.1 R441.1 TP403.1 U402.8 | length 56.2
  F.Cu w0.2: v1(97.024,69.583) 97.024,67.558 99.7,64.883 R438.1 ; v1(103.124,75.565) 103.124,82.095 103.422,82.393 106.052,82.393 v1(106.112,82.333)
  F.Cu w0.25: v1(97.79,60.833) 97.79,62.086 99.7,63.996 R438.1 ; v1(98.933,60.579) 98.983,60.579 99.7,61.296 R441.1
  B.Cu w0.2: v1(97.024,69.583) 98.158,69.583 99.658,71.083 100.862,71.083 101.362,71.583 101.362,73.833 103.094,75.565 v1(103.124,75.565) ; v1(106.112,82.333) 107.112,83.333 107.112,85.333 108.393,86.614 124.46,86.614 v1(125.984,85.09)
  B.Cu w0.25: v1(97.79,60.833) 97.915,60.833 98.169,60.579 v1(98.933,60.579)
EMG2_RECT_SUM1: D432.1 R433.2 R434.2 U402.6 | length 20.8
  F.Cu w0.2: v1(107.569,82.423) 107.579,82.413 107.579,81.397 107.853,81.123 U402.6 ; R433.2 R434.2 112.028,85.011 112.028,85.52 112.208,85.7 119.913,85.7 120.612,85.001 D432.1
  B.Cu w0.2: v1(107.569,82.423) 107.579,82.433 107.579,82.941 109.274,84.636 109.655,84.636 v1(109.728,84.709)
EMG2_RECT_SUM2: R436.2 R437.2 R438.2 U402.9 | length 21.1
  F.Cu w0.2: R438.2 R437.2 v1(101.525,69.583) ; U402.9 106.322,81.123 v1(106.362,81.083) ; v1(105.112,72.333) v1(106.362,73.583)
  B.Cu w0.2: v1(101.525,69.583) 102.362,69.583 v1(105.112,72.333) ; v1(106.362,73.583) v1(106.362,81.083)
EMG2_RECT_U402B_DRV: D431.1 D432.2 U402.7 | length 12.3
  F.Cu w0.2: U402.7 110.354,82.393 v1(110.888,81.859) ; v1(112.612,81.833) 113.362,81.833 115.862,79.333 D431.1 D432.2
  B.Cu w0.2: v1(110.888,81.859) 112.586,81.859 v1(112.612,81.833)
EMG2_REF_BIAS: C404.2 R403.2 R406.2 | length 13
  F.Cu w0.2: v1(117.348,58.547) 117.922,59.121 R406.2 121.097,59.121 122.112,60.136 C404.2
  B.Cu w0.2: v1(112.074,60.083) 113.61,58.547 v1(117.348,58.547)
EMG2_REF_ELECTRODE: J401.S R403.1 | length 10.1
  F.Cu w0.25: R403.1 109.149,52.045 J401.S
EMG2_RG_A: R407.2 U401.1 | length 2.9
  F.Cu w0.2: R407.2 107.823,66.159 107.823,65.268 107.94,65.151 109.512,65.151 109.637,65.026 U401.1
EMG2_RG_B: R407.1 U401.8 | length 2.6
  F.Cu w0.2: R407.1 108.102,68.285 109.202,68.285 109.637,68.721 U401.8
ENV_LPF_NODE: C341.1 R341.2 U302.12 | length 9.6
  F.Cu w0.2: C341.1 60.562,73.046 R341.2 62.112,73.083 64.842,75.813 U302.12
GND: C203.2 C204.2 C205.2 C206.2 C207.2 C208.2 C209.2 C210.2 C211.2 C213.2 C214.2 C215.2 C216.2 C217.2 C218.2 C219.2 C310.1 C321.2 C331.2 C351.2 C360.2 C410.1 C421.2 C431.2 C451.2 C460.2 J201.2 Q201.1 R202.2 R205.2 R210.2 SW501.5 SW501.6 SW501.7 SW501.8 TP206.1 TP305.1 TP405.1 U201.9 U201.14 U202.4 U203.2 U204.2 U205.7 U206.3 U207.3 U301.4 U302.11 U401.4 U402.11 U501.11 | length 90.1
  F.Cu w0.2: v1(84.074,51.562) 84.093,51.581 84.093,53.564 TP305.1 ; v1(93.726,51.435) 93.726,53.034 R205.2 ; v1(98.298,115.189) 98.298,112.747 C213.2 ; TP405.1 120.883,53.562 120.883,51.583 v1(120.904,51.562) ; U501.11 125.222,112.014 TP206.1
  F.Cu w0.25: v1(65.913,77.089) 65.919,77.083 U302.11 ; v1(67.437,86.741) 68.595,85.583 R202.2 ; v1(73.279,73.914) 73.295,73.898 73.295,73.074 C310.1 ; v1(73.279,85.344) 73.404,85.344 73.563,85.503 74.462,85.503 U202.4 ; U301.4 75.111,64.97 v1(75.565,64.516) ; C208.2 79.637,92.858 81.013,94.234 C204.2 C204.2 84.512,94.233 ; v1(81.28,91.186) 81.908,90.558 C203.2 ; v1(84.455,92.075) 84.55,92.075 85.019,91.606 85.339,91.606 86.387,90.558 C205.2 ; C321.2 87.122,73.223 v1(87.122,72.136) ; v1(87.503,103.124) 87.507,103.128 90.045,103.128 Q201.1 ; C218.2 88.387,94.083 87.762,94.083 ; C207.2 91.237,66.108 C451.2 ; C209.2 90.074,98.171 v1(88.265,98.171) ; U207.3 90.302,89.083 90.027,88.808 C219.2 88.637,88.808 89.447,87.998 89.447,87.464 v1(89.535,87.376) 89.623,87.288 89.907,87.288 91.087,86.108 C217.2 ; U206.3 90.302,92.083 89.659,91.44 88.138,91.44 87.503,92.075 87.503,93.824 87.762,94.083 ; v1(90.932,64.008) 91.462,64.538 C451.2 ; C216.2 90.378,96.058 v1(88.265,98.171) ; C217.2@91.137,86.108 92.012,86.983 92.537,86.983 C215.2 ; v1(91.462,69.583) C451.2 ; v1(92.71,73.279) 92.714,73.283 C331.2 ; C211.2 93.387,50.971 93.726,51.31 v1(93.726,51.435) ; U203.2 93.98,98.077 v1(93.98,98.044) ; R210.2 94.287,90.244 v1(94.869,89.662) ; C210.2 100.085,99.06 v1(101.092,99.06) ; v1(100.076,108.204) 100.455,108.583 U204.2 ; U201.9 101.357,83.903 101.948,84.494 102.274,84.494 v1(102.362,84.582) ; U205.7 101.981,91.04 v1(101.981,91.567) ; v1(104.013,72.898) 104.047,72.898 C421.2 ; U402.11 104.637,78.602 v1(104.648,78.613) ; C214.2 105.404,87.266 106.409,87.266 v1(106.426,87.249) ; C410.1 110.345,73.025 v1(110.363,73.025) ; U401.4 112.976,64.97 v1(113.538,65.532) ; C460.2 113.562,79.095 113.792,78.865 v1(113.792,78.74) ; 84.512,94.233 84.512,94.418 v1(88.265,98.171) ; 84.512,94.233 C206.2 87.612,94.233 87.762,94.083
  B.Cu w0.25: v1(91.462,69.583) 92.71,70.831 v1(92.71,73.279)
  other v1: 98.462,73.283 73.312,78.033
LDO_IN: C209.1 C212.2 C216.1 C217.1 Q201.2 R204.1 R209.1 TP203.1 U203.1 U203.3 U204.1 U204.3 U206.4 U207.4 | length 104
  F.Cu w0.4: TP203.1 86.112,50.996 R204.1 88.2,54.421 v1(89.362,55.583) ; v1(91.112,87.658) 91.112,88.458 U207.4@91.687,89.033 ; v1(91.642,93.958) 91.112,94.488 C216.1 93.712,94.508 R209.1 93.975,95.395 U203.3 93.012,97.133 C209.1 93.012,99.033 U203.1 93.612,99.396 93.612,101.471 92.306,102.777 Q201.2 95.862,105.033 ; U206.4@91.862,92.023 92.506,91.379 92.506,91.136 v1(92.583,91.059) ; U204.3 100.712,107.633 98.112,105.033 ; U204.1 100.362,109.533 95.862,105.033 ; C212.2 101.887,105.033 98.112,105.033 ; 95.862,105.033 98.112,105.033
  B.Cu w0.4: v1(89.362,55.583) 89.362,63.833 81.362,71.833 81.362,83.833 83.112,85.583 89.037,85.583 v1(91.112,87.658) 91.937,87.658 92.583,88.304 v1(92.583,91.059) 92.583,93.472 92.174,93.881 91.719,93.881 v1(91.642,93.958)
MCU_ADC_CS: U205.2 U501.13 | length 43
  F.Cu w0.2: U205.2 103.084,87.783 103.312,88.011 123.983,88.011 125.73,89.758 125.73,104.013 U501.13
MCU_ADC_MISO: U205.5 U501.16 | length 33.8
  F.Cu w0.2: U205.5 105.466,89.733 106.366,88.833 123.816,88.833 124.587,89.604 124.587,97.536 U501.16
MCU_ADC_MOSI: U205.4 U501.15 | length 37
  F.Cu w0.2: U205.4 105.621,89.083 106.221,88.483 123.961,88.483 125.095,89.617 125.095,99.568 U501.15
MCU_ADC_SCLK: U205.3 U501.7 | length 15
  F.Cu w0.2: U205.3 102.017,88.476 105.113,88.476 v1(105.156,88.519)
  B.Cu w0.2: v1(105.156,88.519) 105.918,89.281 105.918,97.663 U501.7
NetC212_1: C212.1 U204.4 | length 2.7
  F.Cu w0.2: C212.1 103.387,105.858 103.75,106.22 U204.4
NetC218_1: C218.1 U206.1 | length 2.3
  F.Cu w0.2: C218.1 88.749,92.445 89.27,92.445 89.908,93.083 U206.1
NetC219_1: C219.1 U207.1 | length 2.1
  F.Cu w0.2: C219.1 90.027,90.358 90.302,90.083 U207.1
NetR201_2: R201.2 R202.1 U202.3 | length 5.1
  F.Cu w0.2: R202.1 73.39,86.948 ; R201.2 72.054,88.283 73.39,86.948 ; U202.3 73.39,86.948
NetU202_6: U202.6 U202.7 | length 1.3
  F.Cu w0.2: U202.6 U202.7
RAW_GAIN_FB: R312.1 R313.1 U302.2 | length 12.3
  F.Cu w0.2: R312.1 65.199,71.995 v1(65.612,71.583)
  B.Cu w0.2: v1(65.612,71.583) 65.862,71.333 69.65,71.333 v1(69.699,71.383) 70.9,72.583 71.862,72.583 72.362,73.083 72.362,73.583 71.402,74.543 v1(70.887,74.543)
RAW_HPF_NODE: C311.2 R311.1 U302.3 | length 6.9
  F.Cu w0.2: U302.3 71.562,75.813 72.505,74.871 R311.1 C311.2
SPI_ISO_OE: R209.2 R210.1 TP208.1 U205.8 U206.6 U207.6 | length 22.5
  F.Cu w0.2: U207.6 92.791,90.083 v1(93.724,91.016) 93.724,91.097 93.862,91.235 93.862,92.32 93.637,92.545 93.637,93.283 93.112,93.808 ; U206.6 92.412,93.808 93.112,93.808 ; U205.8 95.937,91.345 R210.1 95.937,94.333 ; TP208.1 97.937,93.083 R209.2 95.937,94.333 ; 93.112,93.808 95.412,93.808 95.937,94.333
  B.Cu w0.2: v1@93.714,91.016 v1(93.724,91.016)
SW_BAT+: Q201.3 SW201.2 TP202.1 | length 12.2
  F.Cu w0.4: SW201.2 83.362,104.083 ; TP202.1 85.112,105.833 83.362,104.083 ; Q201.3 83.362,104.083
TPS7A2033_OUT: C210.1 R207.1 U203.5 | length 5
  F.Cu w0.4: U203.5 98.112,99.033 C210.1 99.112,98.133 R207.1
VREF_MON: C207.1 R203.2 U201.7 | length 17.6
  F.Cu w0.25: C207.1 88.912,68.683 89.737,69.508 R203.2 89.737,69.658 90.818,70.739 97.663,70.739 98.603,71.679 98.984,71.679 v1(99.06,71.755) ; U201.7 98.462,76.283 v1(99.362,75.383)
  B.Cu w0.25: v1(99.06,71.755) 99.06,71.88 99.314,72.134 99.314,75.335 v1(99.362,75.383)
pads on no net: J301.Un1 J301.Un2 J301.Un3 J301.Un4 J301.Un5 J401.Un1 J401.Un2 J401.Un3 J401.Un4 J401.Un5 R.Un1 REF**.Un1 U203.4 U204.5 U205.6 U205.9 U206.2 U207.2 U501.1 U501.2 U501.5 U501.6 U501.9 U501.14 U501.18

## Polygon pours and split planes (outlines as drawn)
GND on B.Cu "GND_L02_P002" (solid, pour order 2): 47.244,115.951 47.248,115.955 136.984,115.955 136.984,46.21 47.239,46.21 47.239,115.947 47.247,115.955

## Keep-outs
F.Cu:
  region: 123.719,89.154 106.519,89.154 106.519,95.607 123.719,95.607
B.Cu:
  region: 123.712,89.154 106.611,89.154 106.532,95.631 123.712,95.631

## Silkscreen, mask and mechanical layers (free items; w line width, h text height)
F.SilkS:
  text "GND" at 127.658,113.307 h0.8
  text "BAT+" at 63.904,112.037 h0.8
  text "SWBAT" at 83.335,111.275 h0.8
  text "3V3C" at 127.531,107.973 h0.8
  text "3V3A" at 102.208,99.795 h0.5
  text "ISO_OE" at 101.115,94.517 h0.8
  text "CH2_RECT" at 127.404,84.738 h0.8
  text "CH1_RAW" at 49.172,80.293 h0.8
  text "CH1_RECT" at 48.41,74.959 h0.8
  text "VREF" at 51.458,69.746 h0.8
  text "CH2_IA" at 113.08,66.14 h0.3
  text "CH1_IA" at 75.411,65.842 h0.5
  text "CH1_ENV" at 49.172,64.672 h0.8
  text "CH2_RAW" at 91.032,60.889 h0.5
  text "GND" at 83.081,55.649 h0.8
  text "CH2_ENV" at 90.397,55.301 h0.5
  text "GND2" at 122.197,53.236 h0.8
  text "LDOIN" at 83.335,48.537 h0.8
  text "BATMON" at 88.161,48.537 h0.8
Edge.Cuts:
  lines w0.254: 67.112,46.083 47.112,46.083 47.112,116.083 137.112,116.083 137.112,46.083 117.112,46.083 ; 80.112,46.083 104.112,46.083

## Text inside footprints (layer, text, board x,y; h text height)
SW201: F.Fab "PAD 2 = PHYSICAL 3" at 77.93,102.004 h0.45; F.Fab "OFF  <->  ON" at 78.034,105.477 h0.55
SW501: F.Fab "on" at 58.772,98.425 h0.8
U501: F.SilkS "USB SIDE TBD" at 113.938,114.43 h0.75; F.SilkS "ANTENNA SIDE TBD" at 113.436,93.93 h0.75; MECH_Dwgs_User "NO COPPER / ANTENNA KEEP-OUT" at 113.102,95.802 h0.5; MECH_Dwgs_User "USB ACCESS KEEP-OUT" at 113.316,113.245 h0.7